# EAGLE board mattduino (EAGLE 8.6.1)
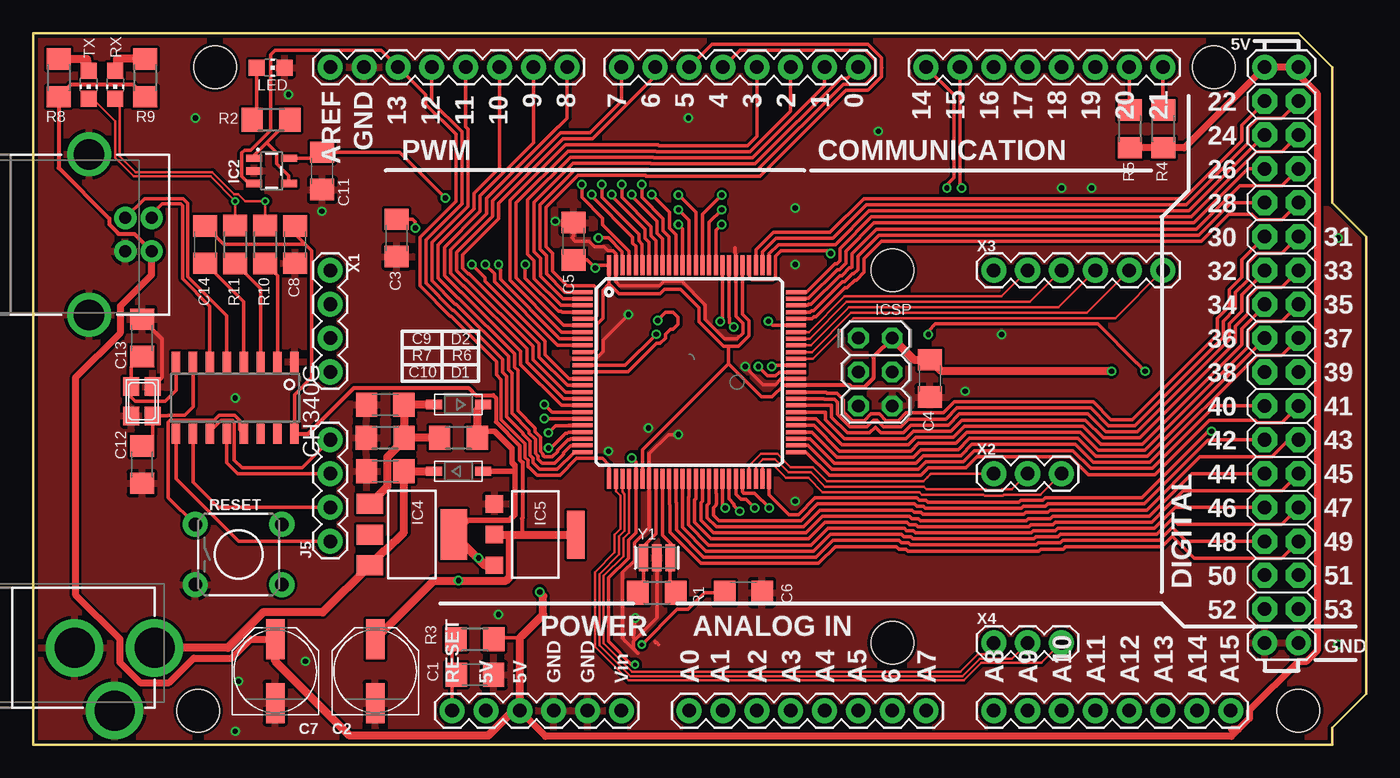
[diagram p0: board, top side]
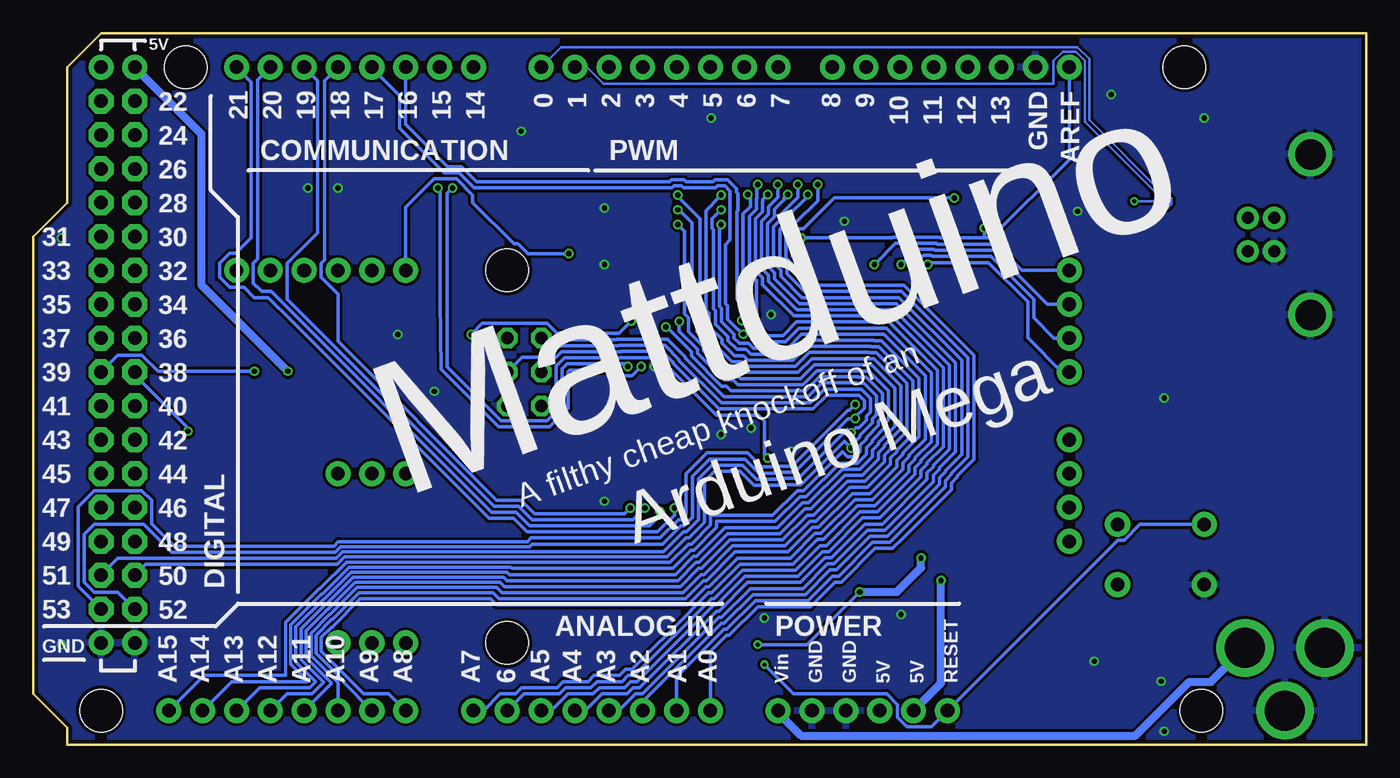
[diagram p1: board, bottom side, seen from below]

Size 100 x 53.34 mm. Coordinates in mm from the lower left corner, seen from the top.
Outline: 100,38.1 97.4,40.7
Outline: 97.4,50.74 97.46,50.8
Copper layers (1*16): Top 0.035mm / dielectric 1.5mm / Bottom 0.035mm
Design rules "dirtypcbs": minimum track width 5mil, minimum drill 12mil, track to track 5mil, track to pad 5mil, pad to pad 5mil, via to via 5mil, smd to smd 0mil, copper to edge 10mil, drill to drill 10mil, minimum pad ring 10mil, minimum via ring 6mil, stop-mask expansion 2mil, vias tented up to drill 25mil, thermal gap 10mil
Net classes: 1 power: width 0.61 mm, drill 0.406 mm, clearance 0.203 mm; 2 gnd: width 0.305 mm, drill 0.406 mm, clearance 0.203 mm; 3 power usb: width 0.508 mm, drill 0.406 mm, clearance 0.203 mm

## Footprints (pad centres in the part's own frame; a part is rotated, then mirrored left to right if it is on the bottom)
C1206 = smd 1.6 x 1.8: 1 -1.4,0; 2 1.4,0
PANASONIC_D = smd 3 x 1.4: + 2.4,0; - -2.4,0
SOD-123 = smd 1.2 x 0.7: A 1.85,0; C -1.85,0
TQFP100 = smd 1.5 x 0.3: 1 -8,6; 2 -8,5.5; 3 -8,5; 4 -8,4.5; 5 -8,4; 6 -8,3.5; 7 -8,3; 8 -8,2.5; 9 -8,2; 10 -8,1.5; 11 -8,1; 12 -8,0.5; 13 -8,0; 14 -8,-0.5; 15 -8,-1; 16 -8,-1.5; 17 -8,-2; 18 -8,-2.5; 19 -8,-3; 20 -8,-3.5; 21 -8,-4; 22 -8,-4.5; 23 -8,-5; 24 -8,-5.5; 25 -8,-6; 51 8,-6; 52 8,-5.5; 53 8,-5; 54 8,-4.5; 55 8,-4; 56 8,-3.5; 57 8,-3; 58 8,-2.5; 59 8,-2; 60 8,-1.5; 61 8,-1; 62 8,-0.5; 63 8,0; 64 8,0.5; 65 8,1; 66 8,1.5; 67 8,2; 68 8,2.5; 69 8,3; 70 8,3.5; 71 8,4; 72 8,4.5; 73 8,5; 74 8,5.5; 75 8,6 | smd 0.3 x 1.5: 26 -6,-8; 27 -5.5,-8; 28 -5,-8; 29 -4.5,-8; 30 -4,-8; 31 -3.5,-8; 32 -3,-8; 33 -2.5,-8; 34 -2,-8; 35 -1.5,-8; 36 -1,-8; 37 -0.5,-8; 38 0,-8; 39 0.5,-8; 40 1,-8; 41 1.5,-8; 42 2,-8; 43 2.5,-8; 44 3,-8; 45 3.5,-8; 46 4,-8; 47 4.5,-8; 48 5,-8; 49 5.5,-8; 50 6,-8; 76 6,8; 77 5.5,8; 78 5,8; 79 4.5,8; 80 4,8; 81 3.5,8; 82 3,8; 83 2.5,8; 84 2,8; 85 1.5,8; 86 1,8; 87 0.5,8; 88 0,8; 89 -0.5,8; 90 -1,8; 91 -1.5,8; 92 -2,8; 93 -2.5,8; 94 -3,8; 95 -3.5,8; 96 -4,8; 97 -4.5,8; 98 -5,8; 99 -5.5,8; 100 -6,8
SOT23-5 = smd 0.55 x 1.2: 1 -0.95,-1.3; 2 0,-1.3; 3 0.95,-1.3; 4 0.95,1.3; 5 -0.95,1.3
SOIC16 = smd 0.635 x 1.524: 1 -4.445,-2.695; 2 -3.175,-2.695; 3 -1.905,-2.695; 4 -0.635,-2.695; 5 0.635,-2.695; 6 1.905,-2.695; 7 3.175,-2.695; 8 4.445,-2.695; 9 4.445,2.695; 10 3.175,2.695; 11 1.905,2.695; 12 0.635,2.695; 13 -0.635,2.695; 14 -1.905,2.695; 15 -3.175,2.695; 16 -4.445,2.695
SOT223 = smd 1.5 x 2: 1 -2.3,-3.15; 2 0,-3.15; 3 2.3,-3.15 | smd 3.8 x 2: 4 0,3.15
SOT223' = smd 1.3 x 1.3: 1 -2.3,-3.05; 2 0,-3.05; 3 2.3,-3.05 | smd 3.6 x 1.3: 4 0,3.05
2X03 = drill 0.95 pad 1.55 octagon: 1 -2.54,-1.27; 2 -2.54,1.27; 3 0,-1.27; 4 0,1.27; 5 2.54,-1.27; 6 2.54,1.27
POWER_JACK_PTH = drill 2.997 pad 4.318: GND 0,7.7; GNDBREAK 4.7,10.7; PWR 0,13.7
1X04 = drill 1.016 pad 1.88: 1 0,0; 2 2.54,0; 3 5.08,0; 4 7.62,0
USB-B-PTH = drill 0.914 pad 1.676: D+ 4,1.25; D- 5.981,1.25; GND 4,-1.25; VBUS 5.981,-1.25 | drill 2.286: SHLD1 1.282,-6.02; SHLD2 1.282,6.02
CHIP-LED0805 = smd 1.2 x 1.2: A 0,-1.05; C 0,1.05
NX3225 = smd 1.4 x 1.2: 1 -1.1,-0.8; 2 1.1,-0.8; 3 1.1,0.8; 4 -1.1,0.8
R1206 = smd 1.6 x 1.803: 1 -1.422,0; 2 1.422,0
TACTILE_SWITCH_PTH_6.0MM = drill 1.016 pad 1.88: 1 -3.251,2.261; 2 3.251,2.261; 3 -3.251,-2.261; 4 3.251,-2.261
ARDUINO_MEGA_SHORTENED_100MM = drill 1.016 pad 1.88: 0 63.5,50.8; 1 60.96,50.8; 2 58.42,50.8; 3 55.88,50.8; 3.3V 35.56,2.54; 4 53.34,50.8; 5 50.8,50.8; 5V@0 38.1,2.54; 5V@1 93.98,50.8; 5V@2 96.52,50.8; 6 48.26,50.8; 7 45.72,50.8; 8 41.656,50.8; 9 39.116,50.8; 10 36.576,50.8; 11 34.036,50.8; 12 31.496,50.8; 13 28.956,50.8; 14 68.58,50.8; 15 71.12,50.8; 16 73.66,50.8; 17 76.2,50.8; 18 78.74,50.8; 19 81.28,50.8; 20 83.82,50.8; 21 86.36,50.8; A0 50.8,2.54; A1 53.34,2.54; A2 55.88,2.54; A3 58.42,2.54; A4 60.96,2.54; A5 63.5,2.54; A6 66.04,2.54; A7 68.58,2.54; A8 73.66,2.54; A9 76.2,2.54; A10 78.74,2.54; A11 81.28,2.54; A12 83.82,2.54; A13 86.36,2.54; A14 88.9,2.54; A15 91.44,2.54; AREF 23.876,50.8; GND@0 40.64,2.54; GND@1 43.18,2.54; GND@2 93.98,7.62; GND@3 96.52,7.62; GND@4 26.416,50.8; RESET 33.02,2.54; VIN 45.72,2.54 | drill 1.016 pad 1.88 octagon: 22 93.98,48.26; 23 96.52,48.26; 24 93.98,45.72; 25 96.52,45.72; 26 93.98,43.18; 27 96.52,43.18; 28 93.98,40.64; 29 96.52,40.64; 30 93.98,38.1; 31 96.52,38.1; 32 93.98,35.56; 33 96.52,35.56; 34 93.98,33.02; 35 96.52,33.02; 36 93.98,30.48; 37 96.52,30.48; 38 93.98,27.94; 39 96.52,27.94; 40 93.98,25.4; 41 96.52,25.4; 42 93.98,22.86; 43 96.52,22.86; 44 93.98,20.32; 45 96.52,20.32; 46 93.98,17.78; 47 96.52,17.78; 48 93.98,15.24; 49 96.52,15.24; 50 93.98,12.7; 51 96.52,12.7; 52 93.98,10.16; 53 96.52,10.16 | hole 3.2: 15.24,50.8; 13.97,2.54; 66.04,35.56; 66.04,7.62; 90.17,50.8; 96.52,2.54
1X03 = drill 1.016 pad 1.88: 1 0,0; 2 2.54,0; 3 5.08,0
1X06 = drill 1.016 pad 1.88: 1 0,0; 2 2.54,0; 3 5.08,0; 4 7.62,0; 5 10.16,0; 6 12.7,0
RESONATOR = smd 0.7 x 2: 1 -1,0; 2 0,0; 3 1,0

## Placement (x,y rotation side)
C1  22p  [C1206]  33.13,5.23 0 top
C2  47uF  [PANASONIC_D]  25.65,5.5 90 top
C3  100n  [C1206]  27.26,38 270 top
C4  100n  [C1206]  67.26,27.46 270 top
C5  100n  [C1206]  40.54,37.75 90 top
C6  100n  [C1206]  53.27,11.39 0 top
C7  47uF  [PANASONIC_D]  18.15,5.5 90 top
C8  0.1uF  [C1206]  19.65,37.5 270 top
C9  10uF  [C1206]  26.4,25.5 180 top
C10  0.1uf  [C1206]  26.4,20.5 180 top
C11  100n  [C1206]  21.67,43.02 90 top
C12  22pf  [C1206]  8.15,21 270 top
C13  22pf  [C1206]  8.15,30.5 90 top
C14  0.1uF  [C1206]  12.9,37.5 270 top
D1  1N4002  [SOD-123]  31.9,20.5 0 top
D2  1N4002  [SOD-123]  31.9,25.5 180 top
IC1  ATMEGA2560-16AU  [TQFP100]  49.2,27.94 0 top
IC2  MCP6021T  [SOT23-5]  17.88,43.02 270 top
IC3  CH340G  [SOIC16]  15.15,26 180 top
IC4  LM317MBSTT3  [SOT223]  28.4,15.75 270 top
IC5  NX1117C33Z  [SOT223']  37.65,15.75 270 top
ICSP  3x2M  [2X03]  63.17,27.94 270 top
J4  POWER_JACK  [POWER_JACK_PTH]  -4.6,7.25 270 top
J5  [1X04]  22.28,15.24 90 top
J6  USB_B_PTH  [USB-B-PTH]  2.9,38.25 0 top
LED  YELLOW  [CHIP-LED0805]  17.8,50.77 270 top
Q1  12Mhz  [NX3225]  8.15,25.75 90 top
R1  1M  [R1206]  46.77,11.39 180 top
R2  1k  [R1206]  17.84,46.87 180 top
R3  1k  [R1206]  33.13,7.88 0 top
R4  10k  [R1206]  84.78,46.18 270 top
R5  10k  [R1206]  82.28,46.18 270 top
R6  240Ω  [R1206]  31.9,23 0 top
R7  720Ω  [R1206]  26.4,23 0 top
R8  1k  [R1206]  1.9,50 90 top
R9  1k  [R1206]  8.4,50 90 top
R10  1k  [R1206]  17.4,37.5 90 top
R11  1k  [R1206]  15.15,37.5 90 top
RESET  MOMENTARY-SWITCH-SPST-PTH-6.0MM  [TACTILE_SWITCH_PTH_6.0MM]  15.4,14.25 0 top
RX  YELLOW  [CHIP-LED0805]  6.15,49.5 180 top
TX  YELLOW  [CHIP-LED0805]  4.15,49.5 180 top
U2  ARDUINO_MEGA_R3_SHORTENED_100MMFULL  [ARDUINO_MEGA_SHORTENED_100MM]  -1.6,0 0 top
X1  [1X04]  22.28,35.56 270 top
X2  [1X03]  72.06,20.32 0 top
X3  [1X06]  72.06,35.56 0 top
X4  [1X03]  72.06,7.62 0 top
Y1  CSTCE16M0V53-R0 16MHZ  [RESONATOR]  46.77,14.01 0 top

## Library data of the parts
C1 C3-C6 C8-C11 C14 = rcl; SPICEPREFIX: C
C2 C7 = SparkFun-Capacitors; PROD_ID: CAP-08478
C12 C13 = rcl
D1 D2 Q1 = adafruit
IC1 ICSP Y1 = SmartPrj
IC2 = SparkFun-IC-Amplifiers; PROD_ID: IC-12504
IC3 = CH340G-USB-SERIAL
IC4 = v-reg; PARTNUMBER: LM317M
IC5 = nxp_60; 12NC: 9352 914 42115; TOLERANCE: 1.25%; VOLTAGE: 5.0V
J4 = SparkFun-Connectors; PROD_ID: CONN-08197
J5 X1 = SparkFun-Connectors; PROD_ID: CONN-09696
J6 = SparkFun-Connectors; PROD_ID: CONN-08278; SF_ID: PRT-00139
LED RX TX = led
R1-R11 = rcl; SPICEPREFIX: R
RESET = SparkFun-Switches; PROD_ID: SWCH-08441; SF_SKU: COM-00097
U2 = Arduino_Mega_Shortened
X2 X4 = SparkFun-Connectors
X3 = SparkFun-Connectors; PROD_ID: CONN-08437

## Nets
3.3V: C2.+ C8.1 C14.1 IC3.16 IC5.2 IC5.4 U2.3.3V
+5V [power usb]: C4.1 C5.1 C6.1 C7.+ C11.2 D1.A D2.C IC1.10 IC1.31 IC1.61 IC1.80 IC1.100 IC2.5 IC4.4 IC5.3 ICSP.2 J6.VBUS R3.2 R4.2 R5.2 R6.2 R8.1 R9.1 U2.5V@0 U2.5V@1 U2.5V@2
AREF: C3.1 IC1.98 U2.AREF
CH340_RX: IC3.3 R11.1
CH340_TX: IC3.2 R10.1
CTS: IC3.9 J5.1
DCD: IC3.12 J5.3
DSR: IC3.10 J5.2
GND [gnd]: C1.2 C2.- C3.2 C4.2 C5.2 C6.2 C7.- C8.2 C9.2 C10.2 C11.1 C12.2 C13.2 IC1.11 IC1.32 IC1.62 IC1.81 IC1.99 IC2.2 IC3.1 IC5.1 ICSP.6 J4.GND J4.GNDBREAK J6.GND J6.SHLD1 J6.SHLD2 LED.C Q1.2 Q1.4 R7.1 RESET.3 U2.GND@0 U2.GND@1 U2.GND@2 U2.GND@3 U2.GND@4 Y1.2
L13: IC2.1 IC2.4 R2.1
N$1: C9.1 D2.A IC4.1 R6.1 R7.2
N$2: LED.A R2.2
N$3: C14.2 IC3.4
N$5: R8.2 TX.A
N$6: R9.2 RX.A
OSCI: C12.1 IC3.7 Q1.1
OSCO: C13.1 IC3.8 Q1.3
PA0/IO22: IC1.78 U2.22
PA1/IO23: IC1.77 U2.23
PA2/IO24: IC1.76 U2.24
PA3/IO25: IC1.75 U2.25
PA4/IO26: IC1.74 U2.26
PA5/IO27: IC1.73 U2.27
PA6/IO28: IC1.72 U2.28
PA7/IO29: IC1.71 U2.29
PB0/IO53: IC1.19 U2.53
PB1/SCK/IO52: IC1.20 ICSP.3 U2.52
PB2/MOSI/IO51: IC1.21 ICSP.4 U2.51
PB3/MISO/IO50: IC1.22 ICSP.1 U2.50
PB4/IO10~: IC1.23 U2.10
PB5/IO11~: IC1.24 U2.11
PB6/IO12~: IC1.25 U2.12
PB7/IO13~: IC1.26 IC2.3 U2.13
PC0/IO37: IC1.53 U2.37
PC1/IO36: IC1.54 U2.36
PC2/IO35: IC1.55 U2.35
PC3/IO34: IC1.56 U2.34
PC4/IO33: IC1.57 U2.33
PC5/IO32: IC1.58 U2.32
PC6/IO31: IC1.59 U2.31
PC7/IO30: IC1.60 U2.30
PD0/SCL/IO21: IC1.43 R4.1 U2.21
PD1/SDA/IO20: IC1.44 R5.1 U2.20
PD2/RXD1/IO19: IC1.45 U2.19
PD3/TXD1/IO18: IC1.46 U2.18
PD4: IC1.47 X2.1
PD5: IC1.48 X2.2
PD6: IC1.49 X2.3
PD7/IO38: IC1.50 U2.38
PE0/RX0: IC1.2 R10.2 RX.C U2.0
PE1/TX0: IC1.3 R11.2 TX.C U2.1
PE2: IC1.4 X1.1
PE3/IO5~: IC1.5 U2.5
PE4/IO2~: IC1.6 U2.2
PE5/IO3~: IC1.7 U2.3
PE6: IC1.8 X1.2
PE7: IC1.9 X1.3
PF0/ADC0: IC1.97 U2.A0
PF1/ADC1: IC1.96 U2.A1
PF2/ADC2: IC1.95 U2.A2
PF3/ADC3: IC1.94 U2.A3
PF4/ADC4: IC1.93 U2.A4
PF5/ADC5: IC1.92 U2.A5
PF6/ADC6: IC1.91 U2.A6
PF7/ADC7: IC1.90 U2.A7
PG0/IO41: IC1.51 U2.41
PG1/IO40: IC1.52 U2.40
PG2/IO39: IC1.70 U2.39
PG3: IC1.28 X4.2
PG4: IC1.29 X4.1
PG5/IO4~: IC1.1 U2.4
PH0/RXD2/IO17: IC1.12 U2.17
PH1/TXD2/IO16: IC1.13 U2.16
PH2: IC1.14 X1.4
PH3/IO6~: IC1.15 U2.6
PH4/IO7~: IC1.16 U2.7
PH5/IO8~: IC1.17 U2.8
PH6/IO9~: IC1.18 U2.9
PH7: IC1.27 X4.3
PJ0/RXD3/IO15: IC1.63 U2.15
PJ1/TXD3/IO14: IC1.64 U2.14
PJ2: IC1.65 X3.6
PJ3: IC1.66 X3.5
PJ4: IC1.67 X3.4
PJ5: IC1.68 X3.3
PJ6: IC1.69 X3.2
PJ7: IC1.79 X3.1
PK0/ADC8: IC1.89 U2.A8
PK1/ADC9: IC1.88 U2.A9
PK2/ADC10: IC1.87 U2.A10
PK3/ADC11: IC1.86 U2.A11
PK4/ADC12: IC1.85 U2.A12
PK5/ADC13: IC1.84 U2.A13
PK6/ADC14: IC1.83 U2.A14
PK7/ADC15: IC1.82 U2.A15
PL0/IO49: IC1.35 U2.49
PL1/IO48: IC1.36 U2.48
PL2/IO47: IC1.37 U2.47
PL3/IO46~: IC1.38 U2.46
PL4/IO45~: IC1.39 U2.45
PL5/IO44~: IC1.40 U2.44
PL6/IO43: IC1.41 U2.43
PL7/IO42: IC1.42 U2.42
RESET: C1.1 IC1.30 IC3.13 ICSP.5 R3.1 RESET.1 U2.RESET
RI: IC3.11 J5.4
USB_N: IC3.6 J6.D-
USB_P: IC3.5 J6.D+
VIN: C10.1 D1.C IC4.3 J4.PWR U2.VIN
XTAL1: IC1.34 R1.1 Y1.3
XTAL2: IC1.33 R1.2 Y1.1

## Tracks (layer width: path | path; a pad name or v marks a point on that pad's centre or on a via)
3.3V  (via drill 0.4)
  Top 0.254: IC3.16 19.59,26.25 20.88,27.54 20.88,37.04 20.41,37.51 | 20.41,37.51 19.65,38.27 C8.1 | C14.1 14.29,37.51 20.41,37.51
  Top 0.305: IC3.16 20.6,23.3 24.05,26.76 32.64,26.76 33.19,26.21 34.5,26.21 34.71,26 34.71,24.19 36.49,22.41 36.49,21.36 36.71,21.14 36.71,17.02 36.65,16.96 36.65,15.75
  Top 0.61: IC5.2 35.9,15.75 | 35.9,15.75 36.65,15.75 IC5.4 | C2.+ 30.04,12.29 v31.9,12.29 35.46,12.29 35.76,12.59 35.76,15.61 35.9,15.75
  Bottom 0.61: U2.3.3V 31.9,4.6 v31.9,12.29
+5V  (via drill 0.3, 0.4)
  Top 0.254: IC1.61 57.18,26.96 56.3,26.96 55.42,26.08 54.63,26.08 52.15,28.55 | IC2.5 21.61,43.97 C11.2 27.48,44.42 v30.9,41 | R3.2 34.67,8 36.5,8 | IC1.10 41.22,29.46 42.09,29.46 42.28,29.65 42.28,31.51 42.74,31.96 42.74,34.09 43.2,34.55 | 43.2,34.55 IC1.100 42.34,35.94 v42.15,35.75 41.55,36.35 C5.1 | IC1.31 45.7,22.1 52.15,28.55 | 47.76,34.14 48.55,34.14 49.94,32.74 49.94,31.72 51.77,29.89 52.15,29.89 | 43.2,34.55 43.71,34.04 43.96,33.79 47.01,33.79 47.35,34.14 47.76,34.14 | 52.15,29.89 52.15,28.55 | 47.76,34.14 | IC1.80 53.2,32.28 53.68,31.79 53.68,30.67 52.9,29.89 52.15,29.89 | v45.65,7.5 48.31,10.16 49.13,10.16 50.37,11.39 C6.1
  Top 0.305: ICSP.2 63.03,29.07 63.03,27.47 62.37,26.81 61.43,26.81 61.3,26.94 IC1.61 | R9.1 7.48,49.5 2.82,49.5 R8.1 1.9,43.25 5.71,39.44 5.71,39.01 6.41,38.31 7.58,38.31 J6.VBUS
  Top 0.406: IC4.4 32.61,16.81 35.71,16.81 36.15,17.25 36.15,20.5 | 36.15,20.5 36.15,20.91 35.93,21.13 35.93,22.17 34.61,23.5 33.32,23.5 | D1.A 36.15,20.5
  Top 0.508: R5.2 R4.2 86.34,44.76 U2.5V@1 U2.5V@2 94.92,50.24 96.32,48.84 96.32,7.04 95.5,6.22 94.9,6.22 91.24,2.56 91.24,1.96 90.42,1.14 | 90.42,1.14 89.9,1.14 | C7.+ 16.31,7.9 14.9,6.49 12.04,6.49 10.18,4.63 8.02,4.63 6.48,6.17 6.48,7.92 3.15,11.25 3.15,27.5 6.54,30.89 6.54,32.89 8.88,35.23 J6.VBUS | 38,9.5 38.02,9.48 38.26,9.72 38.26,9.75 | 90.42,1.14 89.89,0.61 38.43,0.61 U2.5V@0
  Top 0.61: v80.9,28 68.12,28 C4.1 66.06,28.86 ICSP.2 | IC4.4 33.85,13.45 IC5.3 33.95,13.45 v33.4,14 | C7.+ 18.15,6.25 23.74,0.66 34.13,0.66 36.01,2.54 U2.5V@0 36.5,8 36.64,8.14 36.65,8.14 38.26,9.75 38.26,11.12 38,11.38 v38,11.45 | R6.2 33.32,23.5 33.32,25.07 D2.C
  Bottom 0.254: v30.9,41 39.9,41 42.22,38.68 42.68,38.68 43.08,38.28 43.08,37.72 43.03,37.67 43.03,36.63 v42.15,35.75 | v45.65,7.5 41.95,7.5 v38,11.45
  Bottom 0.61: U2.5V@1 87.4,45.82 87.4,34.5 v80.9,28 | v38,11.45 35.2,11.45 33.4,13.25 v33.4,14
AREF  (via drill 0.4)
  Top 0.254: IC1.98 44.18,35.96 44.18,36.97 43.15,38 v42.4,38 | v28.65,38.75 28.65,39.2 28.45,39.4 C3.1
  Bottom 0.254: U2.AREF 22.28,43.87 28.15,38 28.65,38 | v28.65,38.75 28.65,38 | 28.65,38 31.99,38 32.04,38.05 35.49,38.05 35.55,38 v42.4,38
CH340_RX
  Top 0.254: R11.1 17.05,34.17 IC3.3
CH340_TX
  Top 0.254: IC3.2 18.32,35.15 R10.1
CTS
  Top 0.254: J5.1 15.41,15.24 11.15,19.5 10.9,19.75 10.71,19.95 IC3.9
DCD
  Top 0.254: J5.3 15.33,20.32 14.51,21.14 IC3.12
DSR
  Top 0.254: J5.2 13.87,17.78 11.97,19.68 IC3.10
GND  (via drill 0.4)
  Top 0.254: v53.4,28.34 54.74,27 55.67,27 56.11,27.44 IC1.62 | v44.65,32.25 42.74,30.34 42.74,29.46 42.21,28.94 IC1.11 | 52.65,37.25 52.65,36.86 52.68,36.83 52.68,35.96 IC1.81 52.7,32.13 53.23,31.61 53.23,30.86 52.8,30.44 51.87,30.44 50.4,31.91 50.4,33 48.65,34.75 47.32,34.75 46.98,34.42 43.98,34.42 43.7,34.7 IC1.99 43.7,36.81 43.49,37.02 43.13,37.02 42.83,37.32 42.12,37.32 41.68,37.75 40.65,37.75 40.4,38 40.54,38.14 C5.2 | v48.4,23.25 47.65,23.25 46.2,21.8 IC1.32 46.2,16.25 45.09,15.14 45.09,13.8 44.22,12.93 44.22,8.25 | 44.44,7.75 44.4,7.75 44.4,7.79 44.22,7.96 44.22,8.25 | 46.65,7.75 46.77,7.62 | 46.9,7.5 46.77,7.62 | 44.22,8.25 44.24,8.23 44.24,7.94 44.44,7.75 | 45.05,8 v45.15,9.5 | 44.44,7.75 45.32,6.87 | 45.39,6.87 45.02,7.24 45.02,7.76 46.77,9.52 Y1.2 | 46.77,7.62 46.67,7.62
  Top 0.305: Q1.2 9.65,27.55 9.65,30.4 C13.2
  other vias: 39.15,39.25 57.15,18.25 69.9,26.5 72.65,30.75 77.15,41.75 63.4,46 57.15,36 57.15,40.25 97.9,38 97.9,7.5 34.9,9.75 49.15,47 43.15,22 79.4,41.75 15.15,1 15.4,4.75 20.4,6.25 15.15,26 21.65,40 19.15,48.75 46.15,23.75 12.15,47
  pour Bottom: 0,53.5 100,53.5 100,0 0,0
  pour Top: 0,53.5 100,53.5 100,0 0,0
L13
  Top 0.254: IC2.1 16.58,44.19 17.52,45.13 | 17.52,45.13 R2.1 | IC2.4 19.08,42.07 19.15,42 19.15,42.66 18.25,43.56 18.25,44.4 17.52,45.13
N$1
  Top 0.61: R6.1 R7.2 | D2.A C9.1 27.82,25.48 R7.2 | IC4.1 26.57,19.37 26.57,21.58 27.82,22.83 R7.2
N$2
  Top 0.254: LED.A 16.75,46.9 16.78,46.87 | 16.9,46.75 16.78,46.87 | 16.78,46.87 R2.2
N$3
  Top 0.254: C14.2 15.79,33.22 IC3.4
N$5
  Top 0.61: R8.2 4.02,51.42 TX.A
N$6
  Top 0.61: R9.2 6.28,51.42 RX.A
OSCI
  Top 0.254: IC3.7 11.97,25.32 11.35,24.7 10.12,24.7 10.07,24.65 Q1.1 8.95,23.2 C12.1
OSCO
  Top 0.254: IC3.8 10.71,26.55 9.9,25.75 7.65,25.75 7.35,26.05 Q1.3 7.35,28.3 C13.1
PA0/IO22
  Top 0.254: IC1.78 54.2,37.09 55.52,38.41 59.79,38.41 62.32,40.95 86.32,40.95 90.65,45.29 90.65,46.44 92.38,48.16 U2.22
PA1/IO23
  Top 0.254: IC1.77 54.7,36.95 55.71,37.96 59.98,37.96 62.51,40.49 86.51,40.49 91.11,45.1 91.11,46.25 91.85,46.99 93.65,46.99 U2.23
PA2/IO24
  Top 0.254: IC1.76 55.2,36.8 55.9,37.5 60.17,37.5 62.7,40.04 86.7,40.04 U2.24
PA3/IO25
  Top 0.254: U2.25 93.65,44.45 91.76,44.45 86.89,39.58 62.89,39.58 60.5,37.19 60.5,36.3 60.28,36.07 60.13,36.07 57.99,33.94 IC1.75
PA4/IO26
  Top 0.254: U2.26 91.13,43.18 87.08,39.12 63.08,39.12 60.96,37 60.96,36.11 60.47,35.62 60.32,35.62 58.16,33.46 57.98,33.46 57.96,33.44 IC1.74
PA5/IO27
  Top 0.254: U2.27 93.65,41.91 90.51,41.91 87.26,38.66 63.27,38.66 61.42,36.81 61.42,35.81 61.36,35.75 61.25,35.75 60.66,35.16 60.51,35.16 58.35,33 58.17,33 58.11,32.94 IC1.73
PA6/IO28
  Top 0.254: U2.28 89.89,40.64 87.45,38.21 63.46,38.21 61.88,36.62 61.88,35.62 61.55,35.3 61.44,35.3 60.84,34.7 60.7,34.7 58.54,32.55 58.36,32.55 58.26,32.44 IC1.72
PA7/IO29
  Top 0.254: U2.29 93.65,39.37 91.85,39.37 91.44,39.79 89.68,39.79 87.64,37.75 63.65,37.75 62.33,36.43 62.33,35.43 61.74,34.84 61.63,34.84 61.03,34.24 60.88,34.24 58.73,32.09 58.55,32.09 58.41,31.94 IC1.71
PB0/IO53  (via drill 0.4)
  Top 0.254: v38.34,25.5 38.9,24.94 IC1.19
  Bottom 0.254: U2.53 96.65,11.89 96.65,17.85 95.45,19.05 91.85,19.05 91.11,18.31 91.11,16.56 89.44,14.88 77.44,14.88 77.11,15.21 62.93,15.21 62.65,15.49 52.97,15.49 51.6,16.87 51.39,16.87 51.02,17.24 51.02,20.32 49.47,21.87 46.42,21.87 45.36,20.82 44.62,20.82 44.57,20.87 43.09,20.87 38.88,25.07 38.77,25.07 v38.34,25.5
PB1/SCK/IO52  (via drill 0.4)
  Top 0.254: IC1.20 38.65,24.44 v38.34,24.44
  Bottom 0.254: U2.52 93.65,11.43 95.45,11.43 96.19,12.17 96.19,15.77 95.45,16.51 91.71,16.51 89.63,14.43 77.36,14.43 76.96,14.83 62.77,14.83 62.57,15.04 52.78,15.04 51.41,16.41 51.2,16.41 50.56,17.05 50.56,20.13 49.28,21.41 46.61,21.41 45.55,20.36 44.43,20.36 44.38,20.41 42.9,20.41 38.87,24.44 v38.34,24.44 38.34,24.54 37.66,25.22 37.66,25.78 38.06,26.18 39.12,26.18 39.15,26.21 40.46,26.21 41.5,25.17 48.57,25.17 52,28.6 52,28.67 52.81,29.48 55.87,29.48 55.9,29.46 60.38,29.46 ICSP.3
PB2/MOSI/IO51  (via drill 0.4)
  Top 0.254: IC1.21 40.15,23.94 40.17,23.92 | 40.17,23.92 40.9,23.92 | 40.17,23.92 39.19,23.92 v38.65,23.38
  Bottom 0.254: ICSP.4 63.34,29.05 61.44,29.05 60.57,29.91 56.09,29.91 56.06,29.94 52.62,29.94 51.54,28.86 51.54,28.79 48.38,25.62 41.69,25.62 40.65,26.66 38.46,26.66 38.44,26.64 37.87,26.64 37.2,25.97 37.2,24.94 37.5,24.64 37.5,24.32 38.06,23.76 38.27,23.76 v38.65,23.38 38.92,23.63 42.59,19.95 44.19,19.95 44.24,19.9 45.74,19.9 46.8,20.96 49.09,20.96 50.1,19.94 50.1,16.86 51.01,15.95 51.22,15.95 52.72,14.45 76.8,14.45 77.28,13.97 93.65,13.97 U2.51
PB3/MISO/IO50  (via drill 0.4)
  Top 0.254: IC1.22 40.15,23.44 40.05,23.34 39.93,23.34 38.85,22.25 v38.65,22.25
  Bottom 0.254: U2.50 91.57,13.51 77.2,13.51 76.64,14.07 52.46,14.07 51.03,15.49 50.82,15.49 49.64,16.67 49.64,19.75 48.9,20.5 46.98,20.5 45.93,19.45 44.05,19.45 44,19.5 42.41,19.5 39.15,22.75 v38.65,22.25 38.65,22.42 37.97,23.1 37.97,23.2 37.04,24.13 37.04,24.45 36.74,24.75 36.74,26.16 37.68,27.1 38.25,27.1 38.27,27.12 40.84,27.12 41.88,26.08 48.19,26.08 51.08,28.98 51.08,29.05 52.43,30.4 56.25,30.4 56.28,30.37 61.79,30.37 ICSP.1
PB4/IO10~
  Top 0.254: IC1.23 40.3,22.94 40.23,22.88 40.12,22.88 39.33,22.09 39.33,21.97 38.93,21.57 38.37,21.57 38.26,21.68 38.26,21.78 38.04,22 38.04,23.05 37.65,23.44 37.65,23.74 36.36,25.02 36.36,28.05 36.11,28.3 36.11,29.29 31.92,33.49 31.85,33.49 30.38,34.96 30.38,37.48 33.08,40.18 33.08,41.36 34.98,43.26 U2.10
PB5/IO11~
  Top 0.254: U2.11 32.44,46.32 32.62,46.13 32.62,40.37 29.92,37.67 29.92,34.77 31.66,33.03 31.73,33.03 35.66,29.1 35.66,28.11 35.91,27.86 35.91,24.83 37.19,23.55 37.19,23.36 37.66,22.89 37.66,21.84 37.88,21.63 37.88,21.41 38.18,21.11 39.12,21.11 39.79,21.78 39.79,21.9 40.31,22.42 40.42,22.42 40.44,22.44 IC1.24
PB6/IO12~
  Top 0.254: U2.12 29.9,48.21 32.16,45.94 32.16,40.56 29.47,37.86 29.47,34.58 31.47,32.57 31.54,32.57 35.2,28.91 35.2,27.92 35.49,27.63 35.49,24.6 36.74,23.36 36.74,23.28 37.28,22.73 37.28,21.68 37.5,21.47 37.5,21.14 37.99,20.65 39.31,20.65 40.6,21.94 IC1.25
PB7/IO13~
  Top 0.254: IC1.26 43.2,20.95 42.69,21.46 40.77,21.46 39.5,20.2 37.8,20.2 37.25,20.75 37.21,20.75 37.12,20.84 37.12,21.31 36.9,21.52 36.9,22.57 35.11,24.36 35.11,27.36 34.74,27.73 34.74,28.73 31.35,32.12 31.28,32.12 29.01,34.39 29.01,38.05 31.71,40.75 31.71,45.75 29.44,48.02 29.44,48.72 U2.13 26.09,52.07 18.14,52.07 17.82,51.75 17.82,46.08 16.32,44.58 15.84,44.58 15.65,44.38 15.65,42.61 16.19,42.07 IC2.3
PC0/IO37
  Top 0.254: U2.37 93.65,29.21 91.82,29.21 83.77,21.16 79.53,21.16 78.19,22.5 70.43,22.5 69.59,21.67 66.8,21.67 66.22,21.09 60.12,21.09 58.27,22.94 IC1.53
PC1/IO36
  Top 0.254: IC1.54 58.42,23.44 60.31,21.55 66.03,21.55 66.61,22.12 69.4,22.12 70.24,22.96 78.38,22.96 79.72,21.62 83.58,21.62 92.38,30.42 U2.36
PC2/IO35
  Top 0.254: U2.35 93.65,31.75 91.85,31.75 91.11,31.01 91.11,29.8 83.39,22.08 79.91,22.08 78.57,23.42 70.05,23.42 69.21,22.58 66.42,22.58 65.84,22.01 60.49,22.01 58.56,23.94 IC1.55
PC3/IO34
  Top 0.254: U2.34 92.38,32.92 90.65,31.2 90.65,29.99 83.2,22.54 80.1,22.54 78.76,23.88 69.86,23.88 69.02,23.04 66.23,23.04 65.66,22.47 60.68,22.47 58.71,24.44 IC1.56
PC4/IO33
  Top 0.254: U2.33 93.65,34.29 91.85,34.29 91.11,33.55 91.11,32.3 90.2,31.39 90.2,30.18 83.01,22.99 80.29,22.99 78.95,24.33 69.67,24.33 68.83,23.5 66.04,23.5 65.47,22.92 60.87,22.92 59.42,24.37 59.42,24.94 IC1.57
PC5/IO32
  Top 0.254: U2.32 92.38,35.46 90.65,33.73 90.65,32.49 89.74,31.57 89.74,30.36 82.82,23.45 80.48,23.45 79.14,24.79 69.48,24.79 68.64,23.95 65.85,23.95 65.28,23.38 63.6,23.38 63.17,23.81 62.74,23.38 61.06,23.38 59.88,24.56 59.88,25.44 59.18,25.44 59.17,25.44 IC1.58
PC6/IO31
  Top 0.254: U2.31 93.65,36.83 91.85,36.83 91.11,36.09 91.11,34.84 90.2,33.92 90.2,32.68 89.28,31.76 89.28,30.55 82.64,23.91 80.67,23.91 79.33,25.25 69.29,25.25 68.46,24.41 65.66,24.41 65.09,23.84 63.79,23.84 63.29,24.34 63.05,24.34 62.55,23.84 61.25,23.84 60.34,24.75 60.34,25.67 60.11,25.89 59.37,25.89 59.32,25.94 IC1.59
PC7/IO30
  Top 0.254: U2.30 90.65,36.37 90.65,35.03 89.74,34.11 89.74,32.87 88.82,31.95 88.82,30.74 82.45,24.36 80.85,24.36 79.51,25.7 69.1,25.7 68.27,24.87 65.47,24.87 64.9,24.3 63.98,24.3 63.48,24.8 62.86,24.8 62.36,24.3 61.44,24.3 60.8,24.94 60.8,25.86 60.3,26.35 59.55,26.35 59.47,26.44 IC1.60
PD0/SCL/IO21  (via drill 0.4)
  Top 0.254: U2.21 84.76,47.62 R4.1 | IC1.43 51.7,17.95 v51.9,17.75
  Bottom 0.254: v51.9,17.75 51.9,17.21 53.16,15.95 62.96,15.95 63.96,16.96 64.46,16.96 64.47,16.97 65.81,16.97 80.62,31.78 82.36,33.52 83.42,33.52 84.19,34.29 85.29,34.29 86.03,35.03 86.03,36.09 85.29,36.83 84.82,36.83 83.65,38 83.65,49.69 U2.21
PD1/SDA/IO20  (via drill 0.4)
  Top 0.254: U2.20 82.22,47.66 R5.1 | 52.22,19.92 IC1.44 52.2,18.41 52.58,18.03 52.58,17.93 v53.01,17.5
  Bottom 0.254: v53.01,17.5 53.01,17.17 53.77,16.41 62.77,16.41 63.77,17.41 64.27,17.41 64.28,17.42 65.62,17.42 82.17,33.98 82.88,33.98 83.26,34.35 83.28,34.38 83.49,34.59 83.49,36.09 83.15,36.43 83.15,49.87 U2.20
PD2/RXD1/IO19  (via drill 0.4)
  Top 0.254: v54.12,17.75 53.46,18.4 53.1,18.4 52.72,18.78 52.72,19.05 52.7,19.07 IC1.45
  Bottom 0.254: v54.12,17.75 55,16.87 62.58,16.87 63.58,17.87 64.08,17.87 64.09,17.88 65.43,17.88 80.95,33.4 80.95,36.09 78.65,38.39 78.65,49.77 U2.19
PD3/TXD1/IO18  (via drill 0.4)
  Top 0.254: IC1.46 53.2,18.95 53.29,18.86 54.11,18.86 v55.22,17.75
  Bottom 0.254: v55.22,17.75 55.65,17.32 62.39,17.32 63.39,18.33 63.89,18.33 63.9,18.34 65.24,18.34 77.14,30.24 77.14,33.76 78.41,35.03 78.41,36.09 78.15,36.35 78.15,49.79 U2.18
PD4
  Top 0.203: IC1.47 53.7,20.92 54.59,21.81 55.81,21.81 56.81,20.81 58.49,20.81 59.56,19.75 66.78,19.75 67.09,20.06 67.28,20.25 67.35,20.32 X2.1
PD5
  Top 0.203: IC1.48 54.2,20.85 54.75,21.4 55.64,21.4 56.64,20.41 58.33,20.41 59.39,19.34 66.81,19.34 66.99,19.16 71.46,19.16 71.54,19.07 72.58,19.07 72.66,19.16 73.44,19.16 X2.2
PD6
  Top 0.203: IC1.49 54.7,20.77 54.92,21 55.48,21 56.47,20 58.16,20 59.22,18.93 66.47,18.93 66.65,18.75 71.3,18.75 71.38,18.67 72.74,18.67 72.83,18.75 75.57,18.75 X2.3
PD7/IO38  (via drill 0.4)
  Top 0.254: v88.4,23.5 88.15,23.5 83.15,18.5 75.93,18.5 75.75,18.32 74.08,18.32 73.93,18.17 67.12,18.17 66.97,18.32 66.47,18.32 66.29,18.5 58.65,18.5 57.4,17.25 56.7,17.25 55.2,18.75 IC1.50
  Bottom 0.254: v88.4,23.5 88.4,23.75 92.38,27.73 U2.38
PE0/RX0  (via drill 0.3)
  Top 0.203: R10.2 v17.4,40.75 15.9,40.75 15.37,41.28 15.08,41.28 13.43,42.94 7.68,42.94 6.48,44.14 6.48,48.12 RX.C
  Top 0.254: U2.0 61.09,49.99 60.59,49.99 54.15,43.55 46.36,43.55 46.31,43.6 40.49,43.6 37.55,40.66 37.55,36.96 38.04,36.47 38.04,35.12 39.73,33.44 IC1.2
  Bottom 0.203: v17.4,40.75 15.9,40.75 15.37,40.22 14.93,40.22 14.62,40.53 14.62,40.97 14.93,41.28 15.22,41.28 20.78,46.84 20.78,51.42 21.65,52.3 60.4,52.3 U2.0
PE1/TX0  (via drill 0.3)
  Top 0.203: R11.2 v15.15,40.75 13.29,42.61 7.54,42.61 6.15,44 6.15,46.75 4.45,48.45 TX.C
  Top 0.254: U2.1 59.36,49.4 53.96,44.01 46.55,44.01 46.5,44.05 40.3,44.05 37.1,40.85 37.1,36.77 37.58,36.28 37.58,34.94 39.58,32.94 IC1.3
  Bottom 0.203: U2.1 58.47,50.8 57.23,49.55 23.45,49.55 23.45,51.28 22.76,51.97 21.79,51.97 21.11,51.28 21.11,46.71 v15.15,40.75
PE2  (via drill 0.4)
  Top 0.254: IC1.4 39.65,32.44 39.61,32.48 39.39,32.48 36.9,34.97 v36.9,36
  Bottom 0.254: v36.9,36 35.3,37.6 32.23,37.6 32.16,37.52 28.15,37.52 27.98,37.52 27.77,37.52 25.81,35.56 X1.1
PE3/IO5~
  Top 0.254: 41.18,31.96 IC1.5 42.07,31.94 42.28,32.15 42.28,34.23 42.09,34.42 40.04,34.42 38.96,35.5 38.96,36.85 38.47,37.34 38.47,40.28 40.87,42.68 45.93,42.68 45.98,42.63 54.53,42.63 60.97,49.07 62.62,49.07 63.63,50.09 63.63,50.73 63.65,50.75 63.63,50.77 63.63,51.52 62.62,52.53 50.93,52.53 U2.5
PE4/IO2~
  Top 0.254: IC1.6 41.18,31.46 39.77,31.46 36.22,35.01 36.22,40.62 40.11,44.51 46.69,44.51 46.74,44.46 53.77,44.46 56.82,47.51 U2.2
PE5/IO3~
  Top 0.254: U2.3 54.28,45.61 53.59,44.92 46.93,44.92 46.88,44.97 39.92,44.97 35.76,40.81 35.76,34.82 39.64,30.94 IC1.7
PE6  (via drill 0.4)
  Top 0.254: IC1.8 39.49,30.44 35.05,34.88 35.05,35.61 34.91,35.75 v34.91,36
  Bottom 0.254: v34.91,36 33.77,37.14 32.42,37.14 32.34,37.06 27.96,37.06 26.65,35.75 26.46,35.56 23.92,33.02 X1.2
PE7  (via drill 0.4)
  Top 0.254: IC1.9 39.35,29.94 34.59,34.69 34.59,35.31 v33.9,36
  Bottom 0.254: v33.9,36 33.22,36.68 32.61,36.68 32.53,36.61 28.15,36.61 26.72,35.18 26.65,35.1 24.94,33.4 24.94,32 23.42,30.48 X1.3
PF0/ADC0  (via drill 0.4)
  Top 0.254: IC1.97 44.7,37 42.7,39 42.7,39.48 41.15,41.03 v41.15,42
  Bottom 0.254: U2.A0 49.2,6.98 48,8.18 47.79,8.18 45.64,10.33 41.69,10.33 39.84,12.18 39.38,12.18 36.85,14.71 35.53,14.71 34.69,15.54 31.11,19.13 31.11,19.61 30.65,20.07 30.65,20.17 29.43,21.4 29.43,29.19 34.67,34.44 41.94,34.44 43.01,35.51 43.01,35.96 43.54,36.49 43.54,38.47 42.87,39.14 42.8,39.14 41.15,40.79 v41.15,42
PF1/ADC1  (via drill 0.4)
  Top 0.254: v41.9,41.25 41.9,41.14 44.97,38.06 44.97,37.58 45.2,37.35 IC1.96
  Bottom 0.254: v41.9,41.25 41.9,41.14 43.47,39.57 43.47,39.19 44,38.66 44,36.3 43.47,35.77 43.47,35.32 42.13,33.98 34.86,33.98 29.89,29 29.89,21.59 31.11,20.36 31.11,20.26 31.57,19.8 31.57,19.32 35.02,15.87 35.72,15.17 37.04,15.17 39.56,12.64 40.03,12.64 41.88,10.78 45.83,10.78 47.98,8.64 48.19,8.64 51.74,5.09 U2.A1
PF2/ADC2  (via drill 0.4)
  Top 0.254: IC1.95 45.68,36.71 45.68,37.52 45.43,37.77 45.43,38.25 42.65,41.03 v42.65,42
  Bottom 0.254: v42.65,42 42.65,41.03 43.92,39.76 43.92,39.38 44.45,38.85 44.45,36.11 43.92,35.59 43.92,35.13 42.32,33.52 35.05,33.52 30.34,28.81 30.34,21.77 31.57,20.55 31.57,20.45 32.02,19.99 32.02,19.5 35.91,15.62 37.23,15.62 39.75,13.1 40.22,13.1 42.07,11.24 46.02,11.24 48.17,9.1 48.38,9.1 54.28,3.19 U2.A2
PF3/ADC3  (via drill 0.4)
  Top 0.254: IC1.94 46.18,36.71 46.18,37.67 45.89,37.96 45.89,38.65 43.4,41.14 v43.4,41.25
  Bottom 0.254: v43.4,41.25 43.69,40.96 43.69,40.84 44.38,40.16 44.38,39.57 44.91,39.04 44.91,35.92 44.38,35.4 44.38,34.94 42.51,33.06 35.24,33.06 30.8,28.62 30.8,21.96 32.02,20.74 32.02,20.64 32.48,20.18 32.48,19.7 36.09,16.08 37.41,16.08 39.94,13.55 40.41,13.55 42.26,11.7 46.21,11.7 48.36,9.55 48.57,9.55 54.31,3.81 54.81,3.81 56.08,2.54 U2.A3
PF4/ADC4  (via drill 0.4)
  Top 0.254: v44.15,42 44.15,41.03 46.35,38.84 46.35,38.15 46.7,37.8 IC1.93
  Bottom 0.254: v44.15,42 44.15,41.03 44.84,40.35 44.84,39.76 45.37,39.23 45.37,35.74 44.84,35.21 44.84,34.75 42.7,32.61 35.43,32.61 31.26,28.43 31.26,22.15 32.48,20.93 32.48,20.83 32.94,20.37 32.94,19.88 36.28,16.54 37.6,16.54 40.13,14.01 40.6,14.01 42.45,12.16 46.4,12.16 48.55,10.01 48.76,10.01 54.5,4.27 54.99,4.27 55.45,3.81 57.35,3.81 58.62,2.54 U2.A4
PF5/ADC5  (via drill 0.4)
  Top 0.254: IC1.92 47.2,37.94 46.8,38.34 46.8,39.23 44.9,41.14 v44.9,41.25
  Bottom 0.254: v44.9,41.25 45.26,40.89 45.26,40.78 45.3,40.74 45.3,39.95 45.83,39.42 45.83,35.55 45.3,35.02 45.3,34.5 42.95,32.15 35.62,32.15 31.71,28.25 31.71,22.34 32.94,21.12 32.94,21.02 33.39,20.56 33.39,20.07 36.47,17 37.79,17 40.32,14.47 40.79,14.47 42.64,12.61 46.59,12.61 48.74,10.47 48.95,10.47 54.69,4.72 55.18,4.72 55.64,4.27 57.53,4.27 57.99,3.81 59.89,3.81 61.16,2.54 U2.A5
PF6/ADC6  (via drill 0.4)
  Top 0.254: IC1.91 47.7,38.09 47.26,38.53 47.26,39.42 45.65,41.03 v45.65,42
  Bottom 0.254: v45.65,42 45.75,41.9 45.75,41.57 45.72,41.53 45.72,40.97 45.75,40.93 45.75,40.14 46.28,39.61 46.28,35.36 45.75,34.83 45.75,32.33 45.7,32.28 45.7,31.35 45.01,30.65 43.77,30.65 42.73,31.69 35.81,31.69 32.17,28.05 32.17,22.53 33.39,21.31 33.39,21.21 33.85,20.75 33.85,20.26 36.66,17.45 37.98,17.45 40.51,14.92 40.98,14.92 42.83,13.07 46.78,13.07 48.93,10.92 49.14,10.92 54.88,5.18 55.37,5.18 55.83,4.72 57.73,4.72 58.18,4.27 60.07,4.27 60.53,3.81 63.17,3.81 U2.A6
PF7/ADC7  (via drill 0.4)
  Top 0.254: v46.4,41.25 47.72,39.93 47.72,38.72 48.2,38.23 IC1.90
  Bottom 0.254: v46.4,41.25 46.21,41.06 46.21,40.33 46.74,39.8 46.74,35.17 46.21,34.64 46.21,32.14 46.16,32.09 46.16,31.52 46.21,31.47 46.21,31.21 45.2,30.2 43.58,30.2 42.54,31.24 36.57,31.24 36.55,31.21 35.98,31.21 32.63,27.87 32.63,22.72 33.85,21.5 33.85,21.39 34.31,20.94 34.31,20.45 36.85,17.91 38.17,17.91 40.7,15.38 41.17,15.38 43.02,13.53 46.97,13.53 49.12,11.38 49.33,11.38 50.68,10.03 50.7,10.01 55.07,5.64 55.56,5.64 56.02,5.18 57.91,5.18 58.37,4.72 60.27,4.72 60.72,4.27 63.36,4.27 63.82,3.81 64.97,3.81 66.24,2.54 U2.A7
PG0/IO41
  Top 0.254: IC1.51 57.98,21.94 59.74,20.18 66.6,20.18 67.17,20.75 69.97,20.75 70.81,21.59 77.81,21.59 79.15,20.25 84.15,20.25 88.22,24.32 91.67,24.32 91.85,24.13 93.65,24.13 U2.41
PG1/IO40
  Top 0.254: IC1.52 58.12,22.44 59.93,20.64 66.41,20.64 66.98,21.21 69.78,21.21 70.62,22.05 78,22.05 79.34,20.71 83.96,20.71 88.65,25.4 U2.40
PG2/IO39  (via drill 0.4)
  Top 0.254: v83.4,28 82.78,28.62 82.77,28.64 79.85,31.55 67.7,31.55 67.15,31 v67.15,30.75 | IC1.70 55.46,31.44 v55.15,31.75
  Bottom 0.254: v83.4,28 90.64,28 91.85,29.21 93.65,29.21 U2.39 | v55.15,31.75 56.05,30.85 60.71,30.85 61.44,31.59 66.32,31.59 v67.15,30.75
PG3
  Top 0.203: IC1.28 44.2,18.95 44.37,18.78 44.37,16.03 43.95,15.62 43.95,14.27 42.46,12.78 42.46,7.46 44.79,5.14 69.69,5.14 71,6.45 73.43,6.45 X4.2
PG4
  Top 0.203: X4.1 72.06,7.44 71.4,6.78 70.87,6.78 69.55,5.47 44.93,5.47 42.79,7.6 42.79,12.65 44.28,14.13 44.28,15.48 44.7,15.9 IC1.29
PG5/IO4~
  Top 0.254: U2.4 53.01,52.07 62.43,52.07 63.17,51.33 63.17,50.27 62.43,49.53 60.78,49.53 54.34,43.09 46.17,43.09 46.12,43.14 40.68,43.14 38.01,40.47 38.01,37.15 38.5,36.66 38.5,35.31 39.87,33.94 IC1.1
PH0/RXD2/IO17  (via drill 0.4)
  Top 0.254: v46.74,30.77 44.41,28.44 IC1.12
  Bottom 0.254: U2.17 74.6,50.75 72.52,48.67 72.52,46.22 69.19,42.89 68.07,42.89 66.93,41.75 52.08,41.75 51.93,41.9 51.37,41.9 51.22,41.75 48.83,41.75 48.68,41.9 48.12,41.9 47.72,41.5 47.72,37.84 48.06,37.5 48.06,33.06 47.92,32.91 47.92,31.91 47.13,31.12 47.09,31.12 v46.74,30.77
PH1/TXD2/IO16  (via drill 0.4)
  Top 0.254: IC1.13 41.22,27.96 44.61,27.96 46.74,30.09 47.02,30.09 47.42,30.49 47.42,30.77 47.79,31.14 48,31.14 48.38,31.51 48.38,32.03 48,32.41 47.45,32.41 v46.84,31.8
  Bottom 0.254: v46.84,31.8 46.84,33.05 47.2,33.41 47.2,39.99 47.15,40.04 47.15,41.29 47.26,41.41 47.26,41.69 47.93,42.36 48.87,42.36 49.02,42.21 51.03,42.21 51.18,42.36 52.12,42.36 52.27,42.21 66.74,42.21 67.88,43.35 68.9,43.35 72.06,46.51 U2.16
PH2  (via drill 0.4)
  Top 0.254: v32.89,36 33.39,35.51 33.89,35.01 33.89,34.74 38.4,30.24 38.4,29.25 40.21,27.44 IC1.14
  Bottom 0.254: v32.89,36 32.74,36.15 28.34,36.15 25.4,33.21 25.4,30.5 22.84,27.94 X1.4
PH3/IO6~
  Top 0.254: U2.6 46.66,50.14 41.95,45.43 39.73,45.43 34.91,40.6 34.91,39.42 32.21,36.73 32.21,35.72 32.61,35.32 32.68,35.32 37.94,30.05 37.94,29.06 40.06,26.94 IC1.15
PH4/IO7~
  Top 0.254: U2.7 44.12,48.24 41.76,45.88 39.54,45.88 34.45,40.79 34.45,39.61 31.75,36.92 31.75,35.53 32.42,34.86 32.49,34.86 37.49,29.86 37.49,28.87 39.92,26.44 IC1.16
PH5/IO8~
  Top 0.254: U2.8 40.06,46.97 39.42,46.34 39.35,46.34 33.99,40.98 33.99,39.8 31.3,37.11 31.3,35.34 32.23,34.4 32.3,34.4 37.03,29.67 37.03,28.68 39.77,25.94 IC1.17
PH6/IO9~
  Top 0.254: IC1.18 39.62,25.44 36.57,28.49 36.57,29.48 32.11,33.95 32.04,33.95 30.84,35.15 30.84,37.3 33.53,39.99 33.53,41.17 37.52,45.15 U2.9
PH7
  Top 0.203: IC1.27 43.7,18.98 44.04,18.64 44.04,16.17 43.62,15.75 43.62,14.41 42.13,12.92 42.13,7.33 44.66,4.81 69.83,4.81 71.14,6.12 75.64,6.12 X4.3
PJ0/RXD3/IO15  (via drill 0.4)
  Top 0.254: U2.15 69.52,41.87 v69.65,41.75 | IC1.63 55.96,27.94 55.68,27.66 55.08,27.66 v54.4,28.34
  Bottom 0.254: v69.65,41.75 69.49,41.59 69.49,33.25 69.4,28.15 65.09,23.84 61.25,23.84 59.88,25.21 59.88,27.98 59.77,28.09 56.11,28.09 55.68,27.66 55.08,27.66 v54.4,28.34
PJ1/TXD3/IO14  (via drill 0.4)
  Top 0.254: U2.14 69.06,48.72 69.06,42.5 68.54,41.98 v68.54,41.75 | v55.4,28.34 55.5,28.44 IC1.64
  Bottom 0.254: v55.4,28.34 55.6,28.54 59.96,28.54 60.34,28.17 60.34,25.4 61.44,24.3 64.9,24.3 68.94,28.34 68.94,41.35 v68.54,41.75
PJ2
  Top 0.203: IC1.65 58.49,28.94 61.53,31.98 81.18,31.98 X3.6
PJ3
  Top 0.203: IC1.66 58.41,29.44 61.36,32.38 79.05,32.38 X3.5
PJ4
  Top 0.203: IC1.67 58.34,29.94 61.19,32.79 76.91,32.79 X3.4
PJ5
  Top 0.203: IC1.68 58.27,30.44 61.02,33.2 74.78,33.2 X3.3
PJ6
  Top 0.203: IC1.69 58.19,30.94 60.85,33.6 72.64,33.6 X3.2
PJ7  (via drill 0.4)
  Top 0.254: IC1.79 53.72,35.92 53.72,35.05 53.91,34.86 55.49,34.86 55.68,35.05 55.68,36.63 56.09,37.04 59.59,37.04 v59.82,36.82
  Bottom 0.254: v59.82,36.82 62.9,36.82 63.62,37.54 63.94,37.54 67.03,40.62 67.03,41.2 68.26,42.43 69.93,42.43 72.06,40.3 X3.1
PK0/ADC8  (via drill 0.4)
  Top 0.254: IC1.89 48.7,38.7 v48.4,39
  Bottom 0.254: v48.4,39 48.52,38.88 48.52,32.87 48.38,32.73 48.38,31.72 47.42,30.77 47.42,30.49 47.02,30.09 46.34,30.09 45.98,29.74 43.39,29.74 42.35,30.78 36.76,30.78 36.73,30.75 36.16,30.75 33.09,27.68 33.09,22.91 34.31,21.69 34.31,21.59 34.77,21.13 34.77,20.64 37.04,18.37 38.36,18.37 40.89,15.84 41.36,15.84 43.21,13.98 47.16,13.98 49.3,11.84 49.52,11.84 50.89,10.47 65.23,10.47 65.69,10.92 75.48,10.92 77.59,8.81 77.63,8.81 78.4,8.05 78.4,6.99 75.22,3.81 73.33,3.81 U2.A8
PK1/ADC9  (via drill 0.4)
  Top 0.254: v48.4,40.11 49.2,39.31 IC1.88
  Bottom 0.254: v48.4,40.11 49.08,39.42 49.08,38.72 48.97,38.61 48.97,32.68 48.83,32.54 48.83,31.53 47.88,30.58 47.88,30.3 47.21,29.63 46.53,29.63 46.17,29.28 43.2,29.28 42.16,30.32 36.95,30.32 36.92,30.3 36.35,30.3 33.54,27.49 33.54,23.1 34.77,21.88 34.77,21.77 35.22,21.32 35.22,20.83 37.23,18.82 38.55,18.82 41.08,16.3 41.55,16.3 43.4,14.44 47.35,14.44 49.49,12.29 49.7,12.29 51.08,10.92 65.04,10.92 65.5,11.38 75.56,11.38 77.56,9.38 77.61,9.38 78.78,8.21 78.78,6.83 76.68,4.73 76.68,4.62 U2.A9
PK2/ADC10  (via drill 0.4)
  Top 0.254: v48.4,41.22 49.7,39.92 IC1.87
  Bottom 0.254: v48.4,41.22 48.43,41.15 49.54,40.04 49.54,32.63 49.49,32.58 49.49,32.55 49.29,32.35 49.29,31.34 48.34,30.39 48.34,30.11 47.4,29.18 46.71,29.18 46.36,28.82 43.01,28.82 41.97,29.86 37.14,29.86 37.11,29.84 36.54,29.84 34,27.3 34,23.29 35.22,22.07 35.22,21.96 35.68,21.51 35.68,21.02 37.42,19.28 38.74,19.28 41.27,16.75 41.73,16.75 43.59,14.9 47.54,14.9 49.68,12.75 49.89,12.75 51.27,11.38 64.85,11.38 65.25,11.78 75.69,11.78 77.72,9.76 77.76,9.76 79.16,8.36 79.16,7.32 | U2.A10 77.14,4.65 79.16,6.67 79.16,7.32 | 79.16,7.32
PK3/ADC11  (via drill 0.4)
  Top 0.254: v51.65,41.22 50.2,39.77 IC1.86
  Bottom 0.254: v51.65,41.22 51.65,41.07 50,39.42 50,32.44 49.95,32.39 49.95,32.36 49.75,32.16 49.75,31.16 48.8,30.2 48.8,29.92 47.59,28.72 46.92,28.72 46.57,28.37 42.82,28.37 41.78,29.41 37.33,29.41 37.3,29.38 36.73,29.38 34.46,27.11 34.46,23.48 35.68,22.26 35.68,22.15 36.14,21.7 36.14,21.21 37.61,19.74 38.93,19.74 41.46,17.21 41.92,17.21 43.78,15.36 47.73,15.36 49.87,13.21 50.08,13.21 51.46,11.84 64.66,11.84 64.99,12.16 75.85,12.16 77.87,10.14 77.92,10.14 79.54,8.52 79.54,7.47 | U2.A11 77.65,4.57 77.65,4.62 79.54,6.51 79.54,7.47 | 79.54,7.47
PK4/ADC12  (via drill 0.4)
  Top 0.254: v51.65,40.11 50.7,39.16 IC1.85
  Bottom 0.254: v51.65,40.11 51.48,39.93 51.37,39.93 50.57,39.13 50.57,32.37 50.4,32.2 50.4,31.88 50.2,31.68 50.2,30.97 49.25,30.02 49.25,29.73 47.78,28.26 47.11,28.26 46.76,27.91 42.63,27.91 41.59,28.95 37.52,28.95 37.49,28.93 36.92,28.93 34.91,26.92 34.91,23.67 36.14,22.45 36.14,22.34 36.6,21.89 36.6,21.4 37.8,20.2 39.12,20.2 41.65,17.67 42.11,17.67 43.97,15.81 47.92,15.81 50.06,13.67 50.27,13.67 51.64,12.29 64.47,12.29 64.72,12.55 76.01,12.55 78.03,10.52 78.08,10.52 79.92,8.68 79.92,7.63 | U2.A12 80.95,3.81 79.09,3.81 78.23,4.67 79.92,6.36 79.92,7.63 | 79.92,7.63
PK5/ADC13  (via drill 0.4)
  Top 0.254: v51.65,39 51.42,38.77 51.41,38.77 51.2,38.56 IC1.84
  Bottom 0.254: v51.65,39 51.14,38.49 51.14,32.29 50.86,32.01 50.86,30.98 49.71,29.83 49.71,29.54 47.97,27.8 47.3,27.8 46.95,27.45 42.44,27.45 41.4,28.49 37.71,28.49 37.68,28.47 37.11,28.47 35.37,26.73 35.37,23.86 36.6,22.64 36.6,22.53 37.05,22.07 37.05,21.59 37.99,20.65 39.31,20.65 41.84,18.12 42.3,18.12 44.16,16.27 48.1,16.27 50.25,14.12 50.46,14.12 51.84,12.75 64.28,12.75 64.46,12.93 76.17,12.93 78.19,10.9 78.24,10.9 80.31,8.84 80.31,7.79 | U2.A13 83.03,4.27 79.28,4.27 78.83,4.72 80.31,6.2 80.31,7.79 | 80.31,7.79
PK6/ADC14  (via drill 0.4)
  Top 0.254: IC1.83 51.7,31.89 v51.54,31.73
  Bottom 0.254: v51.54,31.73 51.54,31.01 50.17,29.64 50.17,29.35 48.16,27.35 47.49,27.35 47.14,27 42.25,27 41.21,28.04 37.9,28.04 37.87,28.01 37.3,28.01 35.83,26.54 35.83,24.37 36.13,24.07 36.13,23.75 37.05,22.82 37.05,22.72 37.51,22.26 37.51,21.78 38.18,21.11 39.5,21.11 42.03,18.58 42.49,18.58 44.35,16.73 48.73,16.73 48.73,16.29 50.44,14.58 50.65,14.58 52.02,13.21 64.09,13.21 64.19,13.31 76.32,13.31 78.35,11.29 78.4,11.29 80.69,8.99 80.69,7.95 | U2.A14 85.12,4.72 79.47,4.72 79.47,4.82 80.69,6.04 80.69,7.95 | 80.69,7.95
PK7/ADC15  (via drill 0.4)
  Top 0.254: IC1.82 52.2,32.04 52.23,32.01 52.23,31.64 v52.54,31.32
  Bottom 0.254: v52.54,31.32 52.25,31.07 50.62,29.45 50.62,29.16 48.35,26.89 47.99,26.89 47.64,26.54 42.06,26.54 41.02,27.58 38.09,27.58 38.06,27.55 37.49,27.55 36.29,26.35 36.29,24.56 36.59,24.26 36.59,23.94 37.51,23.01 37.51,22.91 37.97,22.45 37.97,21.97 38.37,21.57 38.93,21.57 39.31,21.95 42.22,19.04 42.68,19.04 44.53,17.18 49.19,17.18 49.19,16.48 50.63,15.04 50.84,15.04 52.21,13.67 63.9,13.67 63.93,13.69 76.48,13.69 78.51,11.67 78.55,11.67 81.07,9.15 81.07,8.11 | U2.A15 87.2,5.18 81.07,5.18 81.07,8.11 | 81.07,8.11
PL0/IO49
  Top 0.254: IC1.35 47.72,19.92 47.72,18.03 47.79,17.96 47.79,15.91 50.1,13.59 58.91,13.59 60.17,14.85 64.77,14.85 64.96,14.66 65.46,14.66 65.61,14.51 75.45,14.51 75.6,14.66 77.26,14.66 77.45,14.85 84.67,14.85 85.46,15.63 87.12,13.97 93.65,13.97 U2.49
PL1/IO48
  Top 0.254: IC1.36 48.22,19.92 48.22,18.17 48.24,18.15 48.24,16.1 50.29,14.05 58.73,14.05 59.98,15.3 64.96,15.3 65.15,15.12 65.65,15.12 65.8,14.97 75.26,14.97 75.41,15.12 77.08,15.12 77.26,15.3 84.48,15.3 85.46,16.28 86.49,15.24 U2.48
PL2/IO47
  Top 0.254: 48.72,19.92 IC1.37 48.7,16.29 50.48,14.51 58.54,14.51 59.79,15.76 65.15,15.76 65.34,15.57 65.84,15.57 65.99,15.42 75.07,15.42 75.22,15.57 76.89,15.57 77.07,15.76 84.29,15.76 85.46,16.93 85.87,16.51 93.65,16.51 U2.47
PL3/IO46~
  Top 0.254: U2.46 85.66,17.78 85.32,17.44 | IC1.38 49.2,18.57 49.16,18.53 49.16,16.47 50.67,14.96 58.35,14.96 59.6,16.22 65.34,16.22 65.52,16.03 66.02,16.03 66.18,15.88 74.88,15.88 75.03,16.03 76.7,16.03 76.88,16.22 84.1,16.22 85.32,17.44 | 85.32,17.44
PL4/IO45~
  Top 0.254: 49.72,19.92 IC1.39 49.7,18.42 49.62,18.34 49.62,16.66 50.86,15.42 58.16,15.42 59.41,16.68 65.53,16.68 65.71,16.49 66.21,16.49 66.37,16.34 74.69,16.34 74.84,16.49 76.51,16.49 76.69,16.68 83.91,16.68 85.13,17.89 | U2.45 93.65,19.05 86.29,19.05 85.13,17.89 | 85.13,17.89
PL5/IO44~
  Top 0.254: 50.22,19.92 IC1.40 50.2,18.24 50.1,18.14 50.1,16.82 51.05,15.88 57.97,15.88 59.22,17.13 65.72,17.13 65.9,16.95 66.4,16.95 66.55,16.8 74.5,16.8 74.65,16.95 76.32,16.95 76.5,17.13 83.72,17.13 86.91,20.32 U2.44
PL6/IO43
  Top 0.254: 50.72,19.92 IC1.41 50.7,18.09 50.56,17.95 50.56,17.01 51.24,16.34 57.78,16.34 59.03,17.59 65.91,17.59 66.09,17.4 66.59,17.4 66.74,17.25 74.31,17.25 74.46,17.4 76.13,17.4 76.31,17.59 83.53,17.59 87.53,21.59 92.91,21.59 94.18,22.86 U2.43
PL7/IO42
  Top 0.254: 51.22,19.92 IC1.42 51.2,18.85 51.24,18.81 51.24,18.06 51.22,18.03 51.22,17.96 51.02,17.76 51.02,17.2 51.43,16.79 57.59,16.79 58.84,18.05 66.1,18.05 66.28,17.86 66.78,17.86 66.93,17.71 74.12,17.71 74.27,17.86 75.94,17.86 76.12,18.05 83.34,18.05 88.11,22.82 88.68,22.82 88.73,22.86 U2.42
RESET  (via drill 0.3, 0.4)
  Top 0.254: v44.9,21.5 45.2,21.2 IC1.30 45.2,15.89 44.64,15.33 44.64,13.99 43.15,12.5 43.15,7.75 44.9,6 v45.15,6 | 31.42,5.25 U2.RESET | C1.1 31.71,5.25 31.42,5.25 | R3.1 31.42,7.59 31.42,5.25 | IC3.13 15.47,23.62 15.47,24.33 15.1,24.7 13.93,24.7 13.55,24.32 10.28,24.32 10.13,24.17 10.13,18.53 RESET.1
  Bottom 0.254: ICSP.5 60.8,26.5 60.8,28.36 60.15,29 55.71,29 55.68,29.02 53,29.02 52.45,28.48 52.45,28.41 48.76,24.71 45.61,24.71 45.15,24.25 45.15,21.75 v44.9,21.5 | RESET.1 16.96,16.51 18.16,15.32 18.64,15.32 U2.RESET 32.61,1.35 34.45,1.35 35.15,2.05 35.15,2.99 35.97,3.81 42.96,3.81 v45.15,6
RI
  Top 0.254: J5.4 20.17,20.75 15.65,20.75 15.09,21.31 15.09,24.17 14.94,24.32 14.09,24.32 13.25,23.47 IC3.11
USB_N
  Top 0.254: IC3.6 13.25,32.89 11.21,34.92 11.21,40.42 11.07,40.56 9.65,40.56 8.88,39.79 J6.D-
USB_P
  Top 0.254: IC3.5 14.51,32.15 11.59,35.08 11.59,40.58 11.23,40.94 8.34,40.94 J6.D+
VIN
  Top 0.61: D1.C C10.1 27.8,15.94 26.43,14.57 26.37,14.57 IC4.3 21.71,9.91 17.24,9.91 14.58,7.25 J4.PWR
  Bottom 0.61: J4.PWR 11.65,4.7 13.26,4.7 17.3,0.66 42.4,0.66 44.12,2.38 U2.VIN
XTAL1
  Top 0.254: IC1.34 47.2,15.7 47.9,15 47.9,14.13 Y1.3 47.77,11.81 R1.1
XTAL2
  Top 0.254: IC1.33 46.7,15.8 45.77,14.88 Y1.1 45.77,11.81 R1.2

## Text on the board
bPlace: Mattduino | A filthy cheap knockoff of an | Arduino Mega